# Altium PCB WLED_PCB.PcbDoc
Units mm, origin at the board's own origin, x right, y up, seen from the top; angles counter-clockwise.
Board outline 19.8 x 49.2 mm, 2 copper layers (Top Layer, Bottom Layer); 13 components, 11 nets, 79 pads, 3 vias.
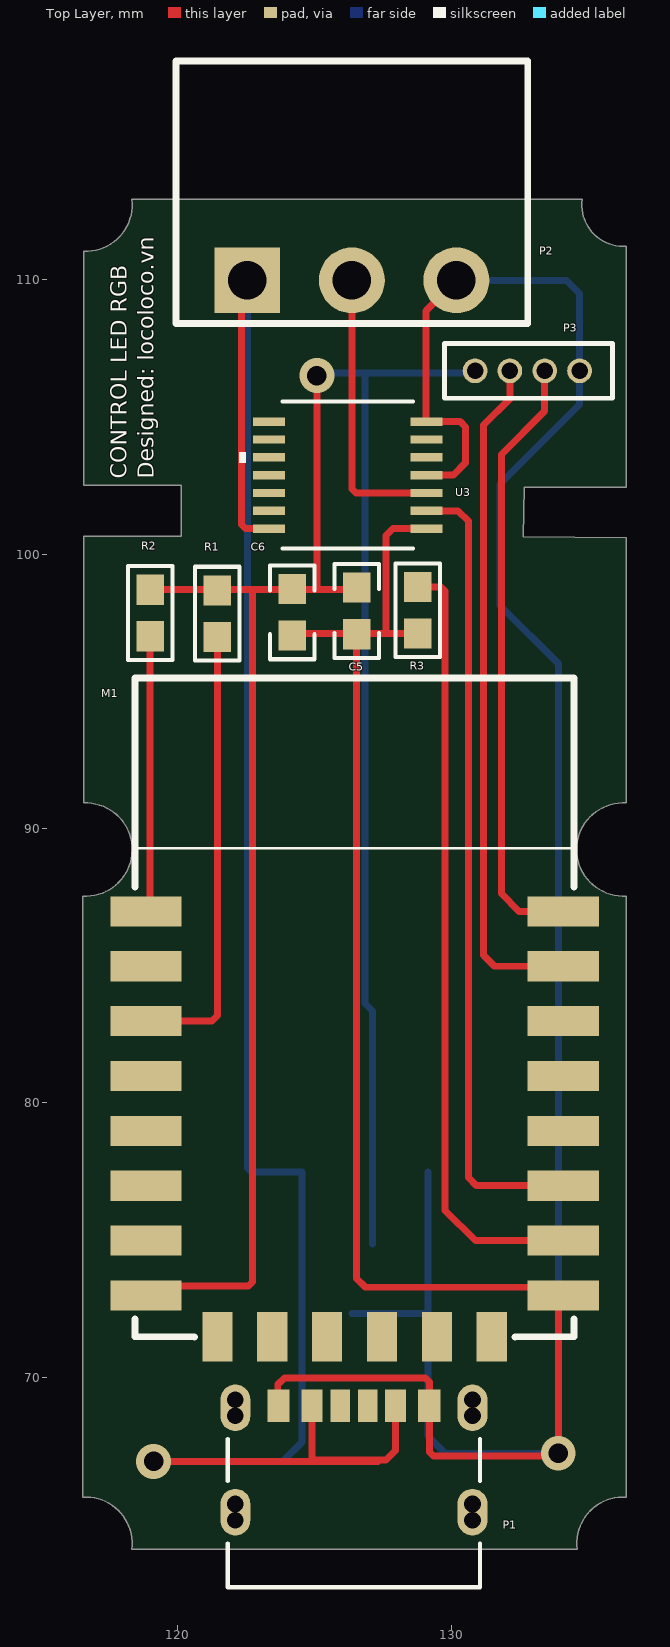
[diagram p0: Top Layer view]
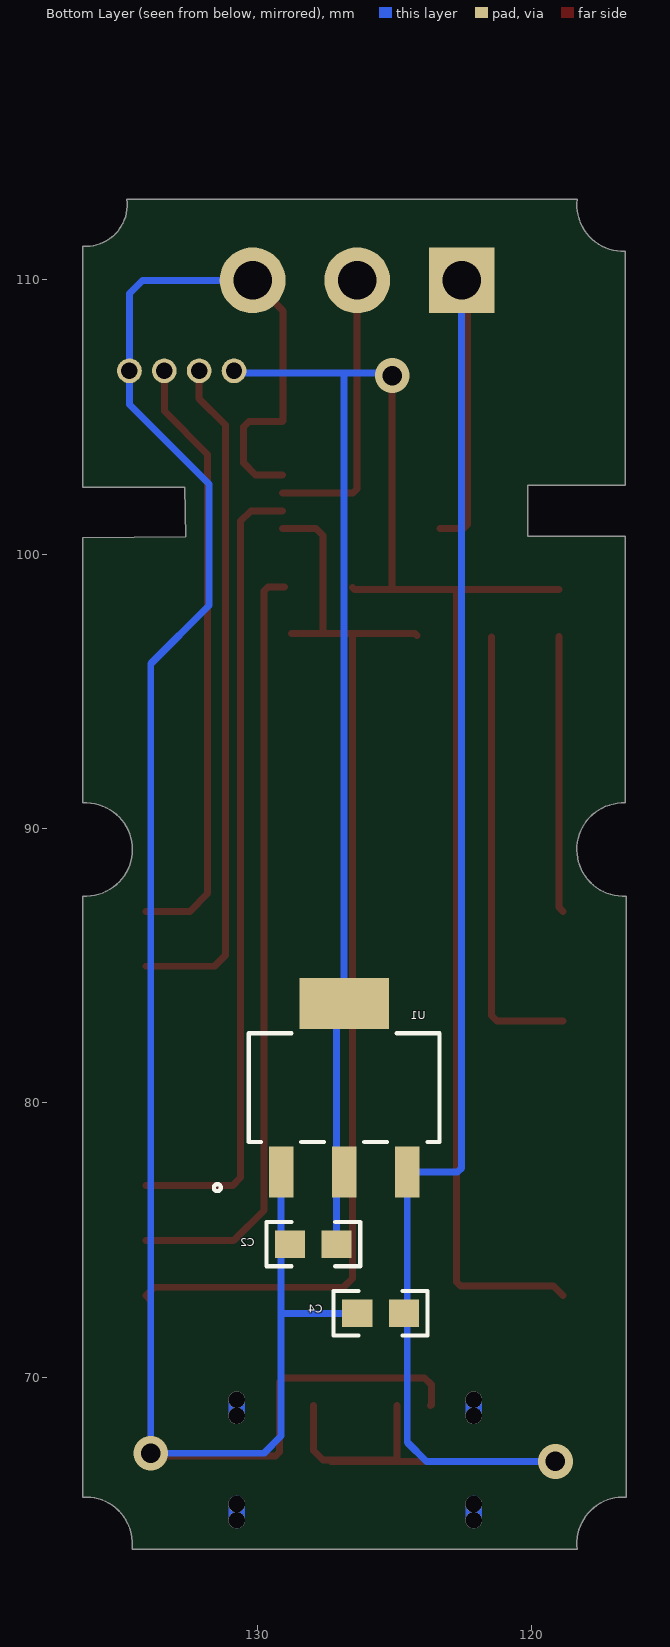
[diagram p1: Bottom Layer view, seen from below]
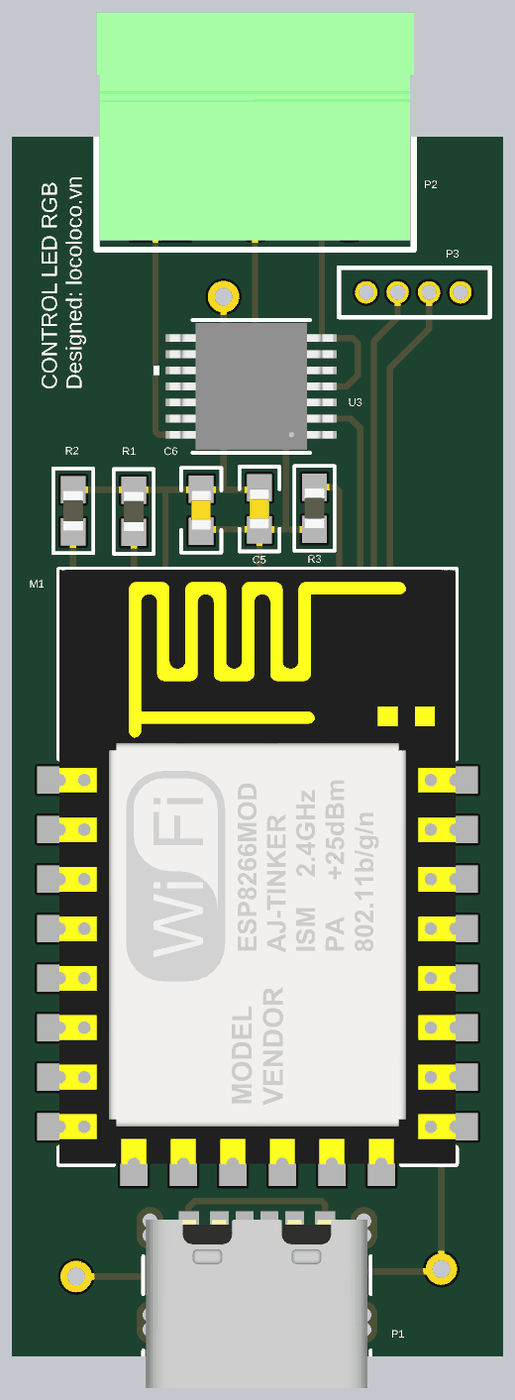
[diagram p2: 3D render of the assembled board from above, using the file's embedded part models]
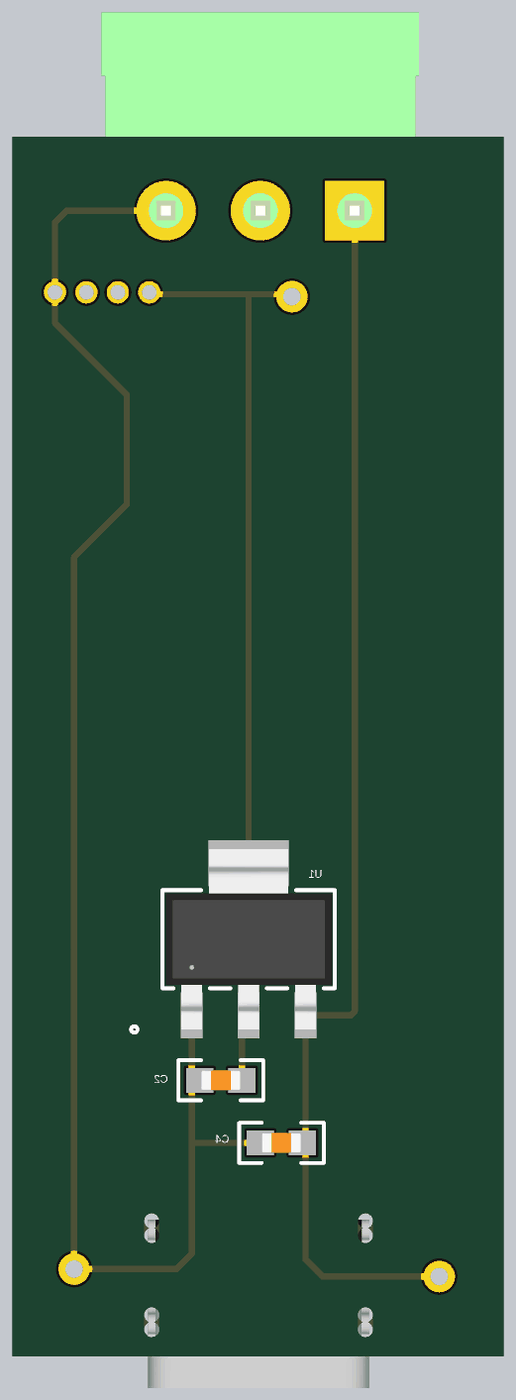
[diagram p3: 3D render of the assembled board from below, using the file's embedded part models]

## Layer stack, top to bottom
Top Solder: solder mask 0.0102, Solder Resist, Dk 3.5
Top Layer: signal copper 0.0356
Dielectric 1: dielectric 0.32, FR-4, Dk 4.8
Bottom Layer: signal copper 0.0356
Bottom Solder: solder mask 0.0102, Solder Resist, Dk 3.5

## Board outline
116.545,65.626 116.545,87.532 ccw(c116.645,89.229) 116.586,90.928 116.586,100.65 120.125,100.65 120.125,102.5 116.586,102.5 116.587,111.03 ccw(c116.645,112.729) 118.333,112.929 134.743,112.929 ccw(c136.245,112.729) 136.345,111.217 136.35,102.425 132.628,102.425 132.6,100.625 136.35,100.6 136.345,90.926 ccw(c136.245,89.229) 136.345,87.532 136.345,65.626 ccw(c136.245,63.929) 134.557,63.729 118.333,63.729 ccw(c116.645,63.929)

## Design rules (kind name [scope] priority, off if disabled: settings)
Clearance [All] p1: gap=0.2 ignorepadtopadclearanceinfootprint=TRUE
DiffPairsRouting [All] p1: maxlimit=0.254 minlimit=0.254 mostfreqgap=0.254 toplayer_minwidth=0.254 toplayer_maxwidth=0.381 toplayer_prefwidth=0.254 bottomlayer_minwidth=0.254 bottomlayer_maxwidth=0.381 bottomlayer_prefwidth=0.254 maxuncoupledlength=12.7
HoleSize [All] p1: absolutevalues=TRUE maxlimit=2.54 minlimit=0.7 maxpercent=80.000 minpercent=20.000
MinimumSolderMaskSliver [All] p1: minsoldermaskwidth=0.15
PolygonConnect [All] p1: connectstyle=Relief reliefconductorwidth=0.254 reliefentries=4 polygonreliefangle="90 Angle" airgapwidth=0.254
RoutingVias [All] p1: holewidth=0.711 width=1.27 viastyle="Through Hole" minholewidth=0.711 minwidth=0.3 maxholewidth=0.711 maxwidth=1.27
ShortCircuit [InNet('No Net') vs InNet('No Net') And OnLayer('Top Layer')] p1: allowed=TRUE
SolderMaskExpansion [All] p1: expansion=0.102 istentingtop=FALSE
UnRoutedNet [All] p1: checkbadconnections=TRUE
Width [All] p1: maxlimit=0.254 minlimit=0.1 preferedwidth=0.254
25 further rules are at their usual default settings.

## Components (designator, comment, footprint, x,y, rotation, side; value= is the part's Value field where it differs from the comment)
C2 "10uF" "CAPC-0603 (1608)" 127.95,74.85 r180 bottom value=22uF/16V
C4 "10uF" "CAPC-0603 (1608)" 125.5,72.325 r180 bottom value=22uF/16V
C5 "22uF/16V" "CAPC-0603 (1608)" 126.525,97.925 r90 top
C6 "100nF" "CAPC-0603 (1608)" 124.175,97.875 r90 top value=22uF/16V
M1 "ESP-12F" "ESP-12E&F Module" 126.45,79.225 r0 top
P1 "USB_TYPE_C-6P" USB_TYPE_C_6P 126.425,65.925 r0 top
P2 "CON 3P 15EDG3.81" HDR_3.81MM_RA_3x1 122.54,109.975 r0 top
P3 "Jump 4x1F 1.27mm" JP4_1.27MM 130.84,106.675 r0 top
R1 "10K" "RESC-0603 (1608)" 121.45,97.825 r90 top
R2 "10K" "RESC-0603 (1608)" 119,97.85 r90 top
R3 "10K" "RESC-0603 (1608)" 128.75,97.95 r90 top
U1 "AMS1117_3v3" SOT-223-3L_UMW 126.825,80.55 r180 bottom
U3 "SN74AHCT125PWR" PW14-L 126.2,102.875 r180 top

## Footprints (in the part's own frame and the unit in brackets; to place one, negate y for a bottom-side part, rotate by r counter-clockwise, add the part's x,y. Pads: shape width x height; smd on the part's side, far side on the other; paste and mask are expansions set on the pad)
"CAPC-0603 (1608)" [mm] "Resistor, Chip; 1.60 mm L X 0.80 mm W X 0.50 mm H body"
  rect 1.1x1 smd mask+0.1: 1(-0.85,0) 2(0.85,0)
  silkscreen extent -1.71,-0.81 1.71,0.81, body extent -0.8,-0.4 0.8,0.4, height 0.6
"ESP-12E&F Module" [mm]
  rect 2.6x1.1 smd: 1(-7.6,7.75) 2(-7.6,5.75) 3(-7.6,3.75) 4(-7.6,1.75) 5(-7.6,-0.25) 6(-7.6,-2.25) 7(-7.6,-4.25) 8(-7.6,-6.25) 15(7.6,-6.25) 16(7.6,-4.25) 17(7.6,-2.25) 18(7.6,-0.25) 19(7.6,1.75) 20(7.6,3.75) 21(7.6,5.75) 22(7.6,7.75)
  rect 1.1x1.8 smd: 9(-5,-7.75) 10(-3,-7.75) 11(-1,-7.75) 12(1,-7.75) 13(3,-7.75) 14(5,-7.75)
  silkscreen extent -8.01,-7.76 8.01,16.25, body extent -8,-7.75 8.01,16.25, height 2.65
HDR_3.81MM_RA_3x1 [mm] "Header 3, pitch 3.81mm, right angle"
  rect 2.4x2.4 hole 1.4: 1(0,0)
  round 2.4 hole 1.4: 2(3.81,0) 3(7.62,0)
  silkscreen extent -2.6,-1.57 10.22,8, body extent -2.6,-1.2 10.22,8, height 7.2
JP4_1.27MM [mm] "JP4_1.27MM"
  round 0.9 hole 0.6: 1(0,0) 2(1.27,0) 3(2.54,0) 4(3.81,0)
  silkscreen extent -1.11,-1 5,1
PW14-L [mil]
  rect 46x12 smd paste+0 mask+0: 1(-113,76.77) 2(-113,51.18) 3(-113,25.59) 4(-113,0) 5(-113,-25.59) 6(-113,-51.18) 7(-113,-76.77) 8(113,-76.77) 9(113,-51.18) 10(113,-25.59) 11(113,0) 12(113,25.59) 13(113,51.18) 14(113,76.77)
  silkscreen extent -94,-106 156,106, body extent -130,-101 130,101, height 47
"RESC-0603 (1608)" [mm] "Resistor, Chip; 1.60 mm L X 0.80 mm W X 0.50 mm H body"
  rect 1.1x1 smd mask+0.1: 1(-0.85,0) 2(0.85,0)
  silkscreen extent -1.71,-0.81 1.71,0.81, body extent -0.8,-0.4 0.8,0.4, height 0.5
SOT-223-3L_UMW [mil]
  rect 35x73 smd paste+0 mask+0: 1(-90.5,-121) 2(0,-121) 3(90.5,-121)
  rect 128x73 smd paste+0 mask+0: 4(0,121)
  silkscreen extent -187,-148 137,78, body extent -132,-144 132,144, height 71
USB_TYPE_C_6P [mil]
  oval 43x67 smd paste-33.5 mask-33.5: 7(-170.08,116.32) 8(170.08,116.32) 9(-170.08,-33.29) 10(170.08,-33.29)
  rect 28x47 smd paste+0 mask+0: A5(-19.68,119.46) B5(19.69,119.46)
  rect 30x47 smd paste+0 mask+0: A9(59.84,119.46) B9(-59.84,119.46)
  rect 32x47 smd paste+0 mask+0: A12(108.27,119.46) B12(-108.27,119.46)
  round 24 / inner round 60 / far side round 24 hole 24 unplated paste-12 mask-12: S_1_H1(-170.08,127.82) S_1_H2(-170.08,104.82) S_2_H1(170.08,127.82) S_2_H2(170.08,104.82) S_3_H1(-170.08,-21.79) S_3_H2(-170.08,-44.79) S_4_H1(170.08,-21.79) S_4_H2(170.08,-44.79)
  Multi-Layer lines w24: -170.08,-44.79 -170.08,-21.79 ; -170.08,104.82 -170.08,127.82 ; 170.08,-44.79 170.08,-21.79 ; 170.08,104.82 170.08,127.82
  silkscreen extent -181,-141 181,71, body extent -176,-138 176,130, height 160

## Part data
C2 C4 C5 C6: library part CL10A226MO7JZNC, "CAP CER 22UF 16V X5R 0603", Category=CAPACITOR, MPN=CL10A226MO7JZNC, PinCount=2, Solder=SMT
M1: "ESP-12F Module", MFR=Espressif, Category=MODULE, MPN=ESP-12F, PinCount=22, Solder=SMT
P2: "Header 3, pitch 3.81mm, right angle"
R1 R2 R3: library part RC0603FR-0710KL, "RES SMD 10K OHM 1% 1/10W 0603", Category=RESISTOR, CompanyID=VT-00328, MPN=RC0603FR-0710KL, Solder=SMT
U3: "No Description Available", Mfr_Name="Texas Instruments", Copyright="Copyright (C) 2023 Ultra Librarian. All rights reserved.", Manufacturer_Part_Number=SN74AHCT125PWR, RefDes=RefDes, Type=DEV

## Via types
v1: diameter 1.27, hole 0.711, Top Layer to Bottom Layer, 3 vias

## Nets (pads, with @x,y where several pads share a name; then routed paths per layer and width w, separated by ;. In a path a pad name is that pad's centre, name@x,y a point inside that pad or via, vN(x,y) a via of type N, cw(c..) or ccw(c..) an arc to the next point about the centre after c; other vN are vias at no path point)
3V3: C2.2 C5.2 C6.2 M1.8 P3.1 R1.2 R2.2 U1.2 U1.4 | length 82.4
  Top Layer w0.254: M1.8 119.2,73.325 122.576,73.325 122.725,73.474 122.725,98.7 ; R2.2 122.725,98.7 ; v1(125.075,106.5) 125.075,98.725 125.05,98.7 ; C5.2 126.45,98.7 125.05,98.7 ; 122.725,98.7 125.05,98.7
  Bottom Layer w0.254: v1(125.075,106.5) 125.175,106.6 126.825,106.6 ; C2.2 127.1,83.348 U1.4 126.825,106.6 ; P3.1 130.765,106.6 126.825,106.6
GND: C2.1 C4.1 C5.1 C6.1 M1.15 P1.A12 P1.B12 P2.3 P3.4 R3.1 U1.1 U3.1 U3.4 U3.7 | length 137.2
  Top Layer w0.254: P1.B12 123.65,68.984 123.65,69.725 123.9,69.975 129.026,69.975 129.175,69.826 P1.A12 129.175,67.274 129.324,67.125 133.775,67.125 v1(133.875,67.225) 133.875,72.8 M1.15 133.75,73.275 126.85,73.275 126.525,73.6 C5.1 ; C6.1 124.25,97.1 127.6,97.1 ; R3.1 127.6,97.1 ; U3.1 127.85,100.925 127.6,100.675 127.6,97.1 ; U3.4 130.05,102.875 130.5,103.325 130.5,104.625 130.3,104.825 U3.7 129.05,104.845 129.05,108.865 P2.3
  Bottom Layer w0.254: C4.1 129.124,72.325 ; U1.1 129.124,72.325 ; P2.3 134.175,109.975 134.65,109.5 P3.4 134.65,105.45 131.75,102.55 131.75,98.125 133.875,96 v1(133.875,67.225) 129.75,67.225 129.124,67.851 129.124,72.325
NetM1_1: M1.1 R2.1 | length 10.1
  Top Layer w0.254: M1.1 119,87.125 R2.1
NetM1_3: M1.3 R1.1 | length 16.5
  Top Layer w0.254: M1.3 121.25,82.975 121.45,83.175 R1.1
NetM1_16: M1.16 R3.2 | length 28.1
  Top Layer w0.254: R3.2@129,98.8 129.601,98.8 129.75,98.651 129.75,76.075 130.85,74.975 M1.16
NetM1_17: M1.17 U3.2 | length 29.2
  Top Layer w0.254: U3.2 130.225,101.575 130.6,101.2 130.6,77.275 130.9,76.975 M1.17
NetM1_19: M1.19
NetM1_21: M1.21 P3.2 | length 24.8
  Top Layer w0.254: P3.2 132.11,105.66 131.15,104.7 131.15,85.375 131.55,84.975 M1.21
NetM1_22: M1.22 P3.3 | length 22.2
  Top Layer w0.254: P3.3 133.38,105.205 131.8,103.625 131.8,87.625 132.45,86.975 M1.22
NetP2_2: P2.2 U3.3 | length 10.4
  Top Layer w0.254: P2.2 126.35,102.375 126.5,102.225 U3.3
Vin: C4.2 P1.A9 P1.B9 P2.1 U1.3 U3.14 | length 75.1
  Top Layer w0.254: v1(119.125,66.925) 127.3,66.925 127.35,66.975 ; P2.1 122.325,109.76 122.325,101.074 122.474,100.925 U3.14 ; P1.B9 124.905,67.005 124.875,66.975 127.35,66.975 ; P1.A9 127.945,67.32 127.6,66.975 127.35,66.975
  Bottom Layer w0.254: v1(119.125,66.925) 123.825,66.925 124.526,67.626 U1.3 122.689,77.477 122.54,77.625 P2.1
pads on no net: M1.2 M1.4 M1.5 M1.6 M1.7 M1.9 M1.10 M1.11 M1.12 M1.13 M1.14 M1.18 M1.20 P1.7 P1.8 P1.9 P1.10 P1.A5 P1.B5 P1.S_1_H1 P1.S_1_H2 P1.S_2_H1 P1.S_2_H2 P1.S_3_H1 P1.S_3_H2 P1.S_4_H1 P1.S_4_H2 U3.5 U3.6 U3.8 U3.9 U3.10 U3.11 U3.12 U3.13

## Silkscreen, mask and mechanical layers (free items; w line width, h text height)
Top Overlay:
  text "CONTROL LED RGB" at 118.339,102.75 h1 r90
  text "Designed: locoloco.vn" at 119.337,102.75 h1 r90
Mechanical 1:
  lines w0.013: 120.348,63.729 120.348,64.924 132.529,64.924 132.529,63.729 ; 116.545,65.626 cw(c116.645,63.929) 118.333,63.729 134.557,63.729 cw(c136.245,63.929) 136.345,65.626 136.345,87.532 cw(c136.245,89.229) 136.345,90.926 136.35,100.6 132.6,100.625 132.628,102.425 136.35,102.425 136.345,111.217 cw(c136.245,112.729) 134.743,112.929 118.333,112.929 cw(c116.645,112.729) 116.587,111.03 116.586,102.5 120.125,102.5 120.125,100.65 116.586,100.65 116.586,90.928 cw(c116.645,89.229) 116.545,87.532 116.545,65.626 ; 119.735,111.581 133.154,111.581 133.154,112.923 119.735,112.923 119.735,111.581

## Text inside footprints (layer, text, board x,y; h text height)
P1: Top 3D Body "*" at 125.599,67.576 h1.27
U3: Top 3D Body "*" at 128.384,101.669 h1.27 r180